# Altium PCB Slot.PcbDoc (part 4 of 4)
Units mm, origin at the board's own origin, x right, y up, seen from the top; angles counter-clockwise.
Board outline 152.4 x 101.6 mm, 2 copper layers (Top Layer, Bottom Layer); 34 components, 37 nets, 230 pads, 62 vias.
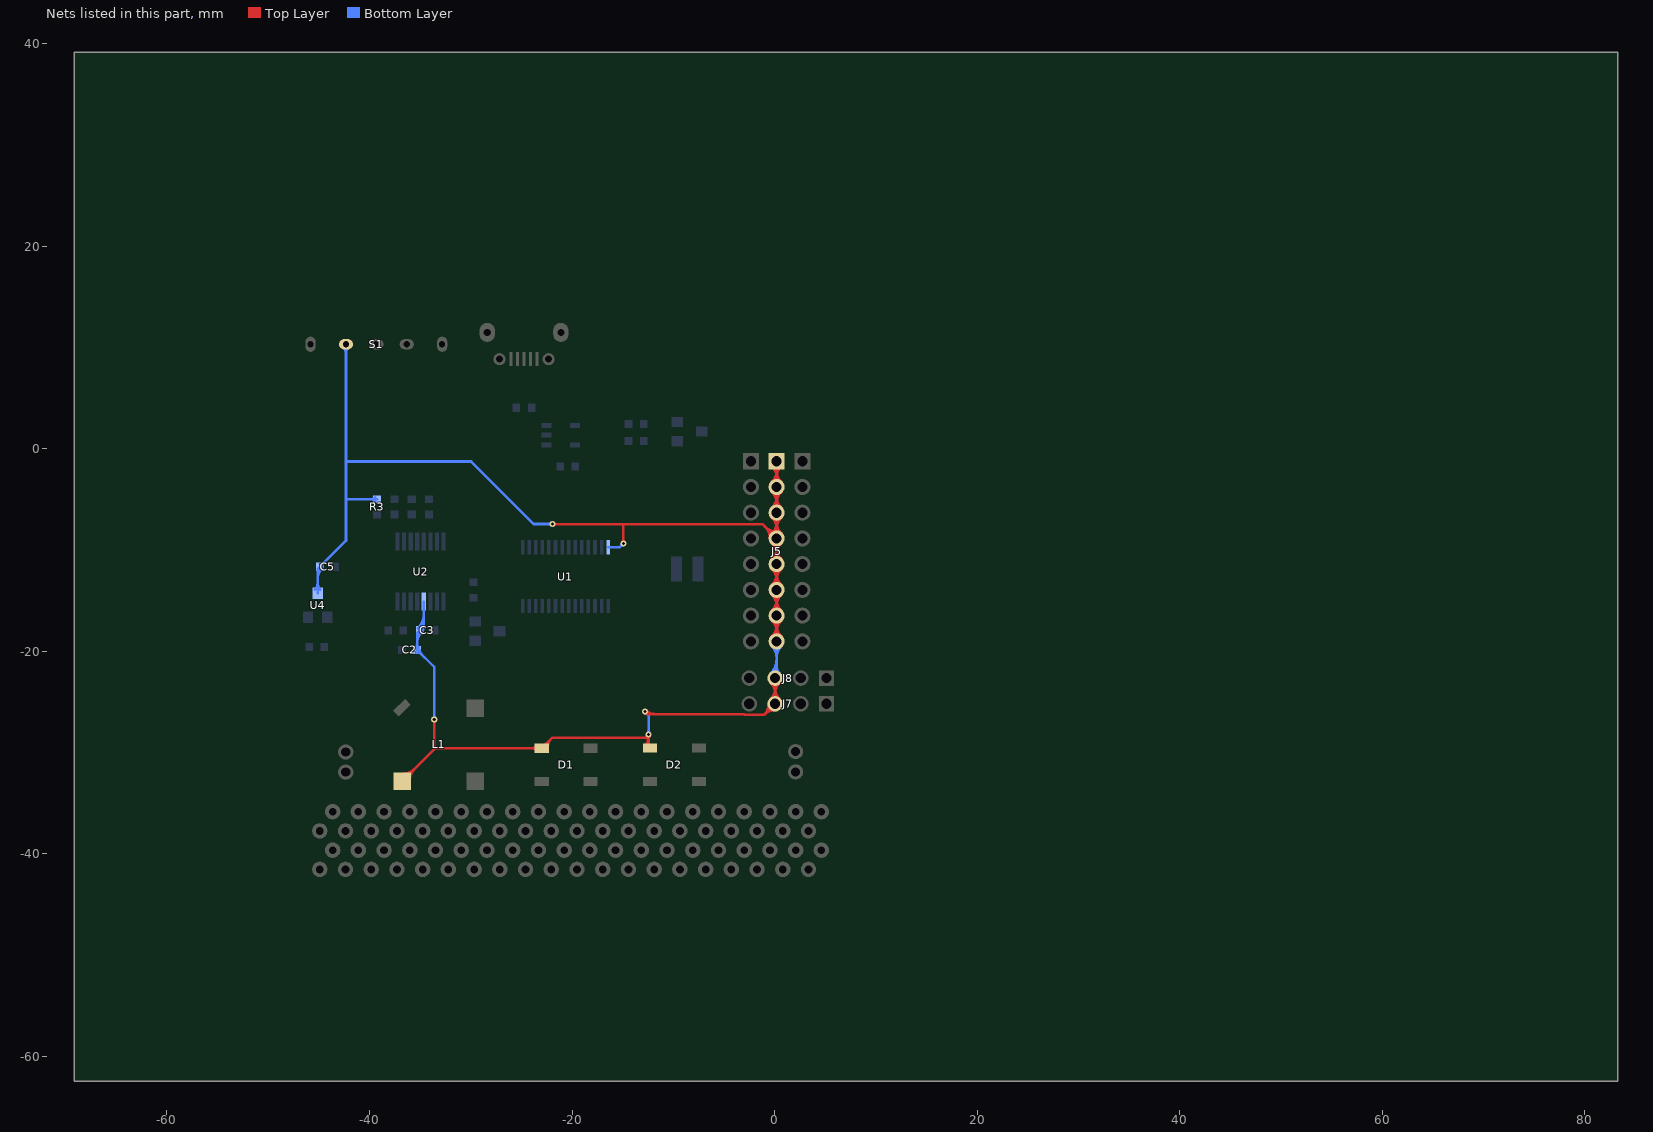
[diagram p4: the nets of this part, all layers, seen from the top]

## Via types
v1: diameter 0.6, hole 0.3, Top Layer to Bottom Layer, 62 vias

## Nets (pads, with @x,y where several pads share a name; then routed paths per layer and width w, separated by ;. In a path a pad name is that pad's centre, name@x,y a point inside that pad or via, vN(x,y) a via of type N, cw(c..) or ccw(c..) an arc to the next point about the centre after c; other vN are vias at no path point) (continued)
VCC: C2.2 C3.2 C5.2 D1.1 D2.1 J5.1 J5.2 J5.3 J5.4 J5.5 J5.6 J5.7 J5.8 J7.3 J8.3 L1.1 R3.2 S1.1 U1.28 U2.12 U4.3 | length 284.1
  Top Layer w0.254: L1.1@-36.758,-32.811 -33.501,-29.555 ; L1.1@-36.758,-32.342 ccw(c-36.758,-31.21) -35.957,-32.011 ccw(c-35.156,-32.811) L1.1@-36.289,-32.811 ; L1.1@-36.758,-32.088 ccw(c-36.758,-30.343) -35.523,-31.577 ccw(c-34.289,-32.811) L1.1@-36.035,-32.811 ; v1@-33.727,-26.843 cw(c-34.022,-27.138) -33.604,-27.138 cw(c-33.187,-27.138) v1@-33.482,-26.843 ; v1(-33.604,-26.721) -33.604,-29.452 -33.501,-29.555 ; D1.1@-23.474,-29.783 ccw(c-24.025,-30.335) -24.025,-29.555 ccw(c-24.025,-28.775) D1.1@-23.474,-29.327 ; D1.1@-22.677,-29.555 cw(c-21.906,-29.555) -22.451,-29.01 ; D1.1@-22.423,-29.555 cw(c-21.039,-29.555) -22.017,-28.577 ; v1(-21.946,-7.417) -21.933,-7.429 -14.935,-7.429 ; v1@-21.823,-7.539 cw(c-21.558,-7.805) -21.558,-7.429 ; v1@-21.823,-7.294 ccw(c-21.498,-6.969) -21.498,-7.429 ; v1@-15.058,-9.225 ccw(c-15.353,-8.93) -14.935,-8.93 ccw(c-14.518,-8.93) v1@-14.813,-9.225 ; v1(-14.935,-9.347) -14.935,-7.429 ; v1@-12.859,-25.991 ccw(c-12.384,-25.516) -12.384,-26.187 ; v1(-12.802,-25.933) -12.548,-26.187 ; v1@-12.679,-25.811 ccw(c-11.771,-24.903) -11.771,-26.187 ; v1@-12.568,-28.342 cw(c-12.864,-28.637) -12.446,-28.637 cw(c-12.028,-28.637) v1@-12.324,-28.342 ; D2.1@-12.302,-29.544 -12.446,-29.4 v1(-12.446,-28.219) -12.751,-28.524 -21.965,-28.524 D1.1@-22.996,-29.555 -33.501,-29.555 ; J7.3@-0.587,-25.171 cw(c-2.12,-25.171) -1.036,-26.255 cw(c0.048,-27.339) J7.3@0.048,-25.806 ; J5.4@-0.47,-8.839 ccw(c-2.095,-8.839) -0.946,-7.69 ccw(c0.203,-6.541) J5.4@0.203,-8.166 ; J7.3@-0.401,-24.722 ccw(c-1.485,-23.638) 0.048,-23.638 ccw(c1.581,-23.638) J7.3@0.497,-24.722 ; J8.3@-0.401,-23.08 cw(c-1.485,-24.164) 0.048,-24.164 cw(c1.581,-24.164) J8.3@0.497,-23.08 ; J7.3@-0.333,-25.171 cw(c-1.252,-25.171) -0.602,-25.822 cw(c0.048,-26.472) J7.3@0.048,-25.552 ; J5.8@-0.273,-18.523 ccw(c-1.422,-17.374) 0.203,-17.374 ccw(c1.828,-17.374) J5.8@0.679,-18.523 ; J5.7@-0.273,-16.935 cw(c-1.422,-18.084) 0.203,-18.084 cw(c1.828,-18.084) J5.7@0.679,-16.935 ; J5.7@-0.273,-15.983 ccw(c-1.422,-14.834) 0.203,-14.834 ccw(c1.828,-14.834) J5.7@0.679,-15.983 ; J5.6@-0.273,-14.395 cw(c-1.422,-15.544) 0.203,-15.544 cw(c1.828,-15.544) J5.6@0.679,-14.395 ; J5.6@-0.273,-13.443 ccw(c-1.422,-12.294) 0.203,-12.294 ccw(c1.828,-12.294) J5.6@0.679,-13.443 ; J5.5@-0.273,-11.855 cw(c-1.422,-13.004) 0.203,-13.004 cw(c1.828,-13.004) J5.5@0.679,-11.855 ; J5.5@-0.273,-10.903 ccw(c-1.422,-9.754) 0.203,-9.754 ccw(c1.828,-9.754) J5.5@0.679,-10.903 ; J5.4@-0.273,-9.315 cw(c-1.422,-10.464) 0.203,-10.464 cw(c1.828,-10.464) J5.4@0.679,-9.315 ; J5.4@-0.273,-8.363 ccw(c-1.422,-7.214) 0.203,-7.214 ccw(c1.828,-7.214) J5.4@0.679,-8.363 ; J5.3@-0.273,-6.775 cw(c-1.422,-7.924) 0.203,-7.924 cw(c1.828,-7.924) J5.3@0.679,-6.775 ; J5.3@-0.273,-5.823 ccw(c-1.422,-4.674) 0.203,-4.674 ccw(c1.828,-4.674) J5.3@0.679,-5.823 ; J5.2@-0.273,-4.235 cw(c-1.422,-5.384) 0.203,-5.384 cw(c1.828,-5.384) J5.2@0.679,-4.235 ; J5.2@-0.273,-3.283 ccw(c-1.422,-2.134) 0.203,-2.134 ccw(c1.828,-2.134) J5.2@0.679,-3.283 ; J5.1@-0.273,-1.695 cw(c-1.422,-2.844) 0.203,-2.844 cw(c1.828,-2.844) J5.1@0.679,-1.695 ; J7.3@-0.221,-24.902 ccw(c-0.871,-24.252) 0.048,-24.252 ccw(c0.968,-24.252) J7.3@0.318,-24.902 ; J8.3@-0.221,-22.901 cw(c-0.871,-23.551) 0.048,-23.551 cw(c0.968,-23.551) J8.3@0.318,-22.901 ; J5.4@-0.216,-8.839 ccw(c-1.227,-8.839) -0.512,-8.124 ccw(c0.203,-7.409) J5.4@0.203,-8.42 ; J5.8@-0.093,-18.703 ccw(c-0.808,-17.988) 0.203,-17.988 ccw(c1.215,-17.988) J5.8@0.499,-18.703 ; J5.7@-0.093,-16.755 cw(c-0.808,-17.471) 0.203,-17.471 cw(c1.215,-17.471) J5.7@0.499,-16.755 ; J5.7@-0.093,-16.163 ccw(c-0.808,-15.448) 0.203,-15.448 ccw(c1.215,-15.448) J5.7@0.499,-16.163 ; J5.6@-0.093,-14.215 cw(c-0.808,-14.931) 0.203,-14.931 cw(c1.215,-14.931) J5.6@0.499,-14.215 ; J5.6@-0.093,-13.623 ccw(c-0.808,-12.908) 0.203,-12.908 ccw(c1.215,-12.908) J5.6@0.499,-13.623 ; J5.5@-0.093,-11.675 cw(c-0.808,-12.391) 0.203,-12.391 cw(c1.215,-12.391) J5.5@0.499,-11.675 ; J5.5@-0.093,-11.083 ccw(c-0.808,-10.368) 0.203,-10.368 ccw(c1.215,-10.368) J5.5@0.499,-11.083 ; J5.4@-0.093,-9.135 cw(c-0.808,-9.851) 0.203,-9.851 cw(c1.215,-9.851) J5.4@0.499,-9.135 ; J5.4@-0.093,-8.543 ccw(c-0.808,-7.828) 0.203,-7.828 ccw(c1.215,-7.828) J5.4@0.499,-8.543 ; J5.3@-0.093,-6.595 cw(c-0.808,-7.311) 0.203,-7.311 cw(c1.215,-7.311) J5.3@0.499,-6.595 ; J5.3@-0.093,-6.003 ccw(c-0.808,-5.288) 0.203,-5.288 ccw(c1.215,-5.288) J5.3@0.499,-6.003 ; J5.2@-0.093,-4.055 cw(c-0.808,-4.771) 0.203,-4.771 cw(c1.215,-4.771) J5.2@0.499,-4.055 ; J5.2@-0.093,-3.463 ccw(c-0.808,-2.748) 0.203,-2.748 ccw(c1.215,-2.748) J5.2@0.499,-3.463 ; J5.1@-0.093,-1.515 cw(c-0.808,-2.231) 0.203,-2.231 cw(c1.215,-2.231) J5.1@0.499,-1.515 ; J8.3@0.048,-22.631 J7.3@0.048,-25.171 -1.044,-26.263 -2.944,-26.263 -3.02,-26.187 -12.548,-26.187 ; J5.8@0.203,-18.999 J5.7@0.203,-16.459 J5.6@0.203,-13.919 J5.5@0.203,-11.379 J5.4@0.203,-8.839 ; J5.1@0.203,-1.219 J5.2@0.203,-3.759 J5.3@0.203,-6.299 J5.4@0.203,-8.839 ; -14.935,-7.429 -1.207,-7.429 J5.4@0.203,-8.839 ; v1@-12.782,-26.105 cw(c-12.75,-26.39) -12.548,-26.187 ; v1@-12.782,-26.105 cw(c-12.75,-26.39) -12.548,-26.187 ; v1@-12.782,-26.105 cw(c-12.75,-26.39) -12.548,-26.187 ; D2.1@-12.781,-29.316 ccw(c-13.588,-28.508) v1@-12.446,-28.508 ; D2.1@-12.781,-29.316 ccw(c-13.588,-28.508) v1@-12.446,-28.508 ; D2.1@-12.781,-29.316 ccw(c-13.588,-28.508) v1@-12.446,-28.508 ; -12.741,-28.515 ccw(c-13.037,-28.219) v1@-12.619,-28.219 ; -12.741,-28.515 cw(c-12.446,-28.81) v1@-12.446,-28.392 ; -12.741,-28.515 ccw(c-13.037,-28.219) v1@-12.619,-28.219 ; -12.741,-28.515 cw(c-12.446,-28.81) v1@-12.446,-28.392 ; -12.741,-28.515 ccw(c-13.037,-28.219) v1@-12.619,-28.219 ; -12.741,-28.515 cw(c-12.446,-28.81) v1@-12.446,-28.392 ; v1@-12.63,-25.953 ccw(c-12.345,-25.985) -12.548,-26.187 ; v1@-12.63,-25.953 ccw(c-12.345,-25.985) -12.548,-26.187 ; v1@-12.63,-25.953 ccw(c-12.345,-25.985) -12.548,-26.187 ; v1@-12.596,-28.306 cw(c-13.178,-28.642) -12.529,-28.816 ; v1@-12.596,-28.306 cw(c-13.178,-28.642) -12.529,-28.816 ; v1@-12.596,-28.306 cw(c-13.178,-28.642) -12.529,-28.816 ; v1@-12.596,-28.306 cw(c-13.178,-28.642) -12.529,-28.816 ; v1@-12.596,-28.306 cw(c-13.178,-28.642) -12.529,-28.816 ; v1@-12.596,-28.306 cw(c-13.178,-28.642) -12.529,-28.816 ; -12.446,-29.021 ccw(c-12.029,-29.021) D2.1@-12.324,-29.316 ; -12.446,-29.021 ccw(c-12.029,-29.021) D2.1@-12.324,-29.316 ; -12.446,-29.021 ccw(c-12.029,-29.021) D2.1@-12.324,-29.316
  Bottom Layer w0.254: U4.3@-45.39,-13.904 ccw(c-46.04,-13.254) -45.121,-13.254 ccw(c-44.201,-13.254) U4.3@-44.851,-13.904 ; U4.3@-45.121,-14.237 -45.121,-11.859 C5.2@-44.895,-11.633 -42.322,-9.06 -42.322,-4.978 ; -45.121,-12.801 cw(c-43.752,-12.801) C5.2@-44.72,-11.834 ; -45.121,-12.188 cw(c-44.366,-12.188) C5.2@-44.899,-11.654 ; C5.2@-44.895,-11.36 ccw(c-44.895,-10.701) -44.429,-11.167 ; C5.2@-44.647,-11.608 cw(c-44.109,-11.608) -44.49,-11.228 ; S1.1@-42.585,10.069 cw(c-43.222,9.432) -42.322,9.432 cw(c-41.421,9.432) S1.1@-42.058,10.069 ; S1.1@-42.322,10.333 -42.322,-1.245 ; R3.2@-39.243,-4.977 -42.32,-4.977 -42.322,-4.978 ; C2.2@-35.293,-20.11 cw(c-35.293,-20.769) -34.827,-20.303 ; -35.293,-19.141 cw(c-33.831,-19.141) C3.2@-34.865,-18.107 ; -35.293,-18.527 cw(c-34.445,-18.527) C3.2@-35.044,-17.928 ; C3.2@-35.215,-17.707 ccw(c-36.613,-16.309) -34.636,-16.309 ; C2.2@-35.045,-19.862 ccw(c-34.506,-19.862) -34.887,-20.243 ; C3.2@-35.04,-17.907 -35.293,-18.16 C2.2@-35.293,-19.837 -33.604,-21.526 v1(-33.604,-26.721) ; C3.2@-35.036,-17.886 ccw(c-36,-16.922) -34.636,-16.922 ; C3.2@-34.856,-18.066 ccw(c-35.387,-17.535) -34.636,-17.535 ; -34.636,-17.503 U2.12@-34.636,-15.084 ; v1@-33.727,-26.598 ccw(c-34.022,-26.303) -33.604,-26.303 ccw(c-33.187,-26.303) v1@-33.482,-26.598 ; v1@-22.068,-7.539 ccw(c-22.363,-7.834) -22.363,-7.417 ccw(c-22.363,-6.999) v1@-22.068,-7.294 ; v1(-21.946,-7.417) -23.8,-7.417 -29.972,-1.245 -42.322,-1.245 ; U1.28@-16.434,-9.719 -15.307,-9.719 v1(-14.935,-9.347) ; v1@-15.108,-9.347 cw(c-15.526,-9.347) -15.231,-9.643 cw(c-14.935,-9.938) v1@-14.935,-9.52 ; v1@-12.802,-26.106 cw(c-12.802,-26.524) -12.506,-26.229 cw(c-12.211,-25.933) v1@-12.629,-25.933 ; v1(-12.802,-25.933) -12.446,-26.289 v1(-12.446,-28.219) ; v1@-12.568,-28.097 ccw(c-12.864,-27.802) -12.446,-27.802 ccw(c-12.028,-27.802) v1@-12.324,-28.097 ; J8.3@-0.401,-22.182 ccw(c-1.858,-20.725) 0.203,-20.725 ; J5.8@-0.273,-19.475 cw(c-1.422,-20.624) 0.203,-20.624 cw(c1.828,-20.624) J5.8@0.679,-19.475 ; J8.3@-0.221,-22.362 ccw(c-1.245,-21.338) 0.203,-21.338 ; J5.8@-0.093,-19.295 cw(c-0.808,-20.011) 0.203,-20.011 cw(c1.215,-20.011) J5.8@0.499,-19.295 ; J8.3@0.048,-22.631 0.203,-22.477 J5.8@0.203,-18.999 ; 0.203,-21.472 ccw(c1.208,-21.472) J8.3@0.497,-22.182 ; -42.322,-4.978 -42.322,-1.245 ; -39.867,-4.977 ccw(c-39.867,-4.378) R3.2@-39.443,-4.802 ; -39.867,-4.977 cw(c-39.867,-5.576) R3.2@-39.443,-5.152 ; -39.867,-4.977 ccw(c-39.867,-4.378) R3.2@-39.443,-4.802 ; -39.867,-4.977 cw(c-39.867,-5.576) R3.2@-39.443,-5.152 ; -39.867,-4.977 ccw(c-39.867,-4.378) R3.2@-39.443,-4.802 ; -39.867,-4.977 cw(c-39.867,-5.576) R3.2@-39.443,-5.152 ; C2.2@-35.468,-19.637 ccw(c-35.891,-19.214) -35.293,-19.214 ; C2.2@-35.468,-19.637 ccw(c-35.891,-19.214) -35.293,-19.214 ; C2.2@-35.468,-19.637 ccw(c-35.891,-19.214) -35.293,-19.214 ; -35.293,-19.214 ccw(c-34.694,-19.214) C2.2@-35.117,-19.637 ; -35.293,-19.214 ccw(c-34.694,-19.214) C2.2@-35.117,-19.637 ; -35.293,-19.214 ccw(c-34.694,-19.214) C2.2@-35.117,-19.637
pads on no net: D2.2 J1.1 J1.2 J1.4 J1.6 J1.8 J1.10 J1.11 J1.12 J1.14 J1.15 J1.16 J1.17 J1.18 J1.20 J1.22 J1.24 J1.26 J1.28 J1.29 J1.30 J1.31 J1.32 J1.34 J1.35 J1.36 J1.38 J1.40 J1.42 J1.44 J1.46 J1.48 J1.50 J1.52 J1.53 J1.54 J1.56 J1.58 J1.60 J1.62 J1.63 J1.64 J1.66 J1.68 J1.69 J1.70 J1.72 J1.74 J1.76 J1.78 J1.79 J1.80 L1. P0.2 P0.3 P0.4 S1. S1.3 U1.11 U1.12 U1.13 U1.15 U1.16 U1.17 U1.18 U1.19 U1.20 U1.21 U1.22 U1.25 U2.8 U3.1

## Polygon pours and split planes (outlines as drawn)
GND on Top Layer "Bottom Layer-No Net" (solid, remove dead copper, pour order 4): -48.618,-42.792 -48.618,13.208 -17.618,13.208 -17.618,5.708 8.382,5.708 8.382,-42.792 -48.618,-42.792
GND on Bottom Layer "Bottom Layer-No Net" (solid, remove dead copper, pour order 3): -48.618,-42.792 -48.618,13.208 -17.618,13.208 -17.618,5.708 8.382,5.708 8.382,-42.792 -48.618,-42.792

## Keep-outs
Keep-Out Layer:
  circle w0.15: c-48.118,1.708 r2.4
  circle w0.15: c7.882,1.708 r2.4
  lines w0.15: -48.618,-2.268 -48.618,-42.792 8.382,-42.792 8.382,-2.268 ; -48.617,-2.261 cw(c-48.118,1.708) -48.617,5.677 ; -48.618,5.683 -48.618,11.208 cw(c-46.618,11.208) -46.618,13.208 -19.618,13.208 cw(c-19.618,11.208) -17.618,11.208 -17.618,5.708 7.86,5.708 cw(c7.882,1.708) 8.381,-2.261

## Text inside footprints (layer, text, board x,y; h text height)
Bat: Bottom Overlay "+" at -7.899,-10.389 h1
L1: Top Overlay "+" at -36.02,-30.651 h1 r270